# Altium PCB fet-adapter.PcbDoc
Units mil, origin at the board's own origin, x right, y up, seen from the top; angles counter-clockwise.
Board outline 1224 x 925 mil, 2 copper layers (Top Layer, Bottom Layer); 6 components, 18 nets, 45 pads, 1 vias.
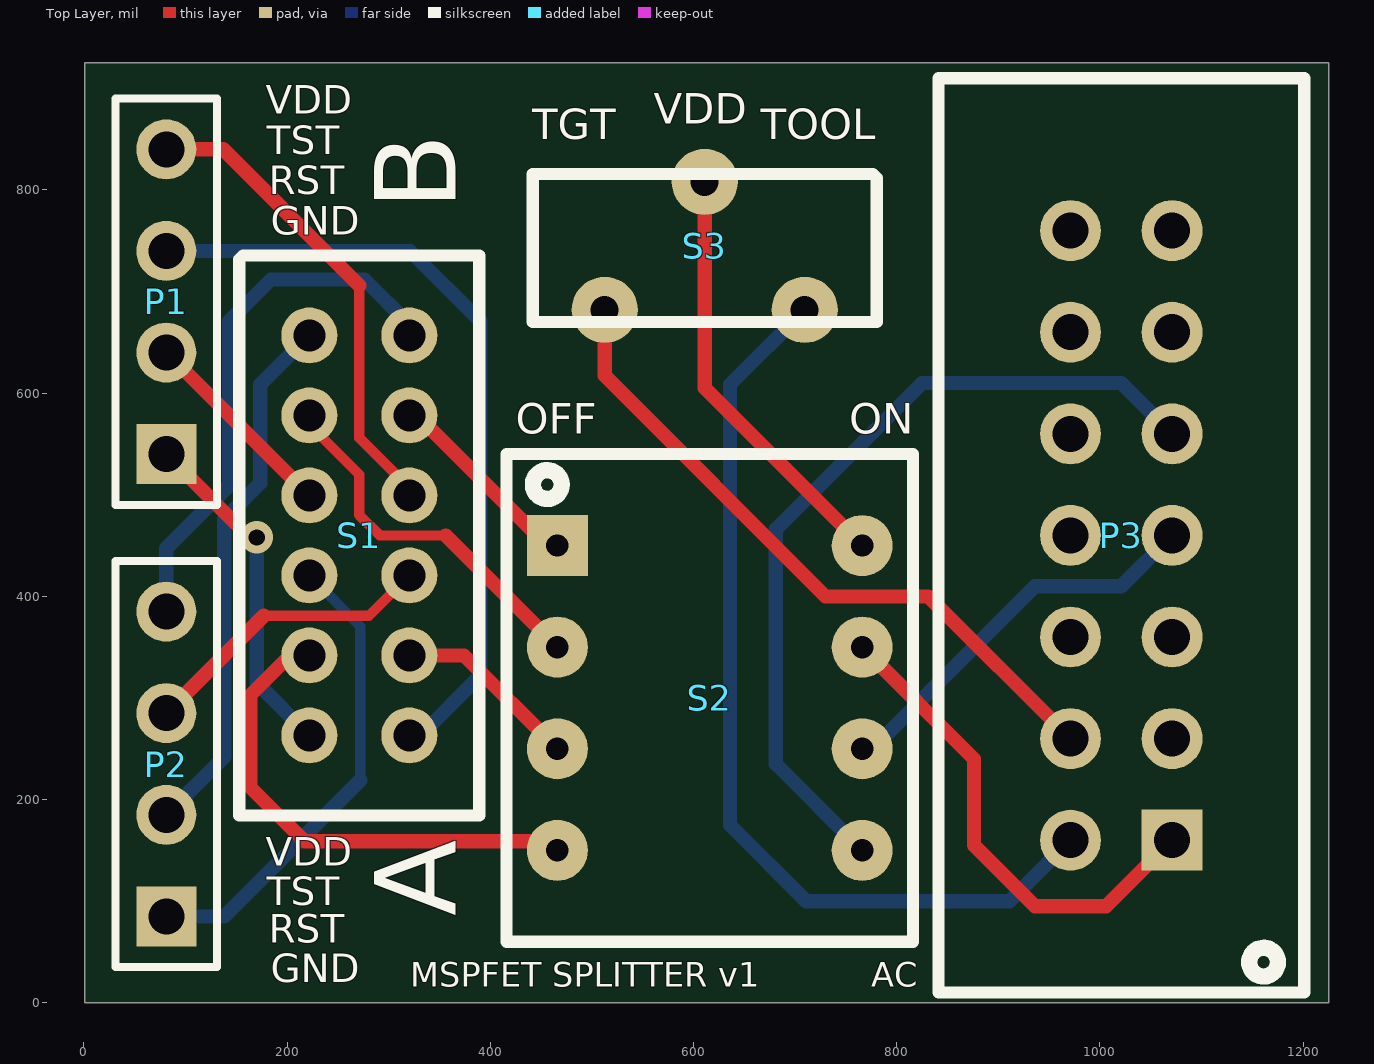
[diagram p0: Top Layer view]
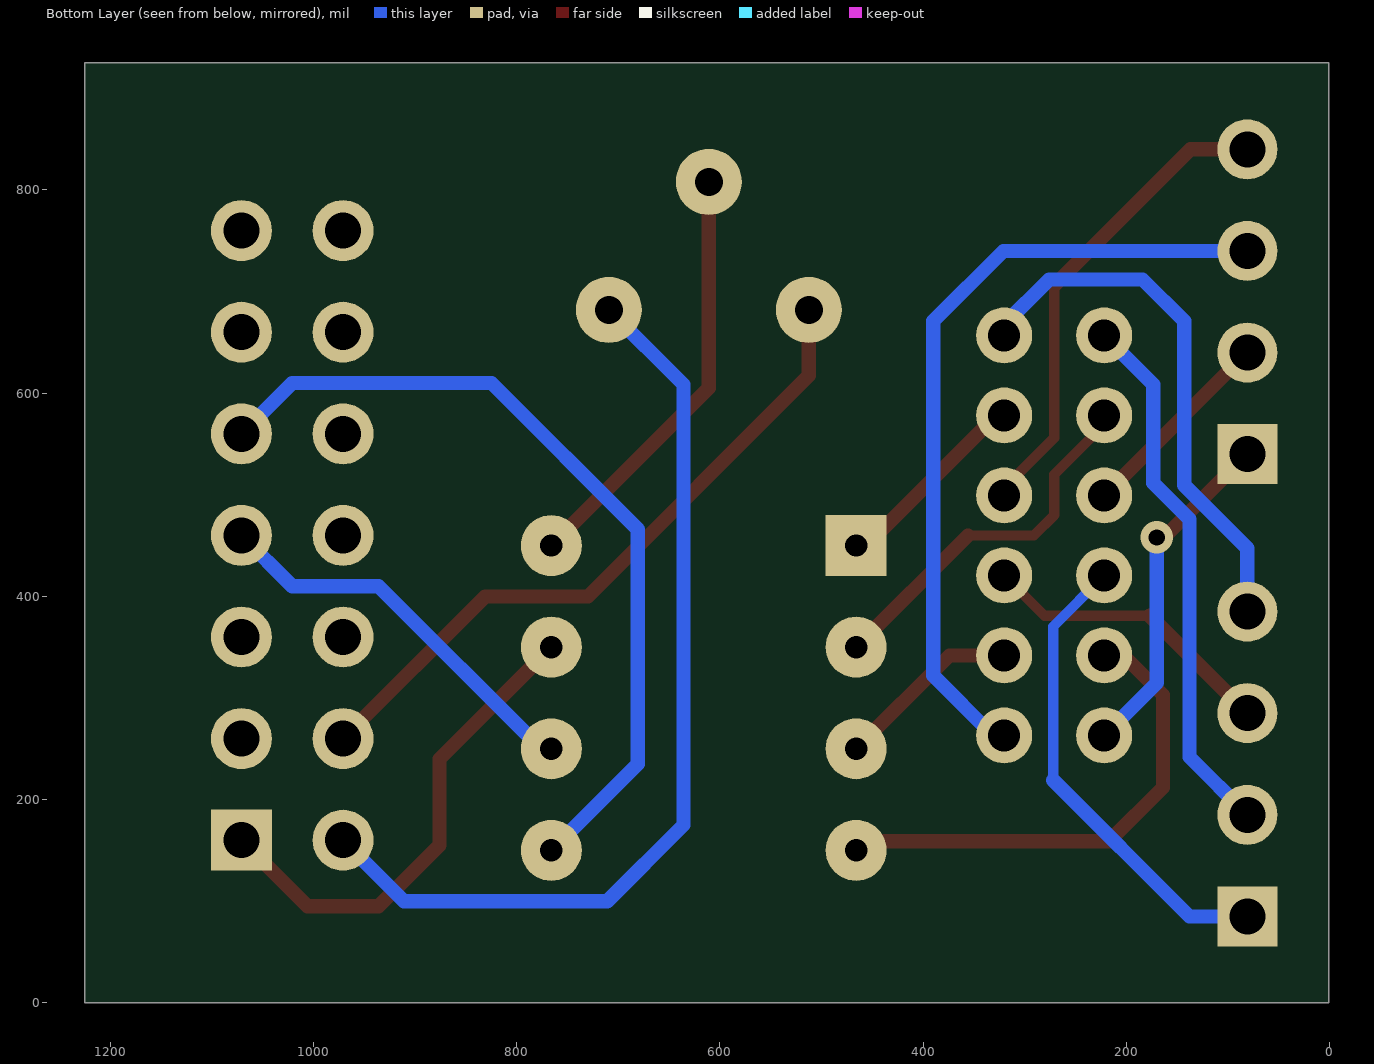
[diagram p1: Bottom Layer view, seen from below]

## Layer stack, top to bottom
Top Solder: solder mask 0.4, Solder Resist, Dk 3.5
Top Layer: signal copper 1.4
Dielectric 1: dielectric 12.6, FR-4, Dk 4.8
Bottom Layer: signal copper 1.4
Bottom Solder: solder mask 0.4, Solder Resist, Dk 3.5

## Board outline
1,0 1225,0 1225,925 1,925

## Design rules (kind name [scope] priority, off if disabled: settings)
Clearance [All] p1: gap=10 ignorepadtopadclearanceinfootprint=FALSE except(0: Arc-Hole Track-Hole SMDPad-Hole THPad-Hole Via-Hole Fill-Hole Poly-Hole Region-Hole Text-Hole; 6: Arc-Arc Arc-Track Arc-SMDPad Arc-THPad Arc-Via Arc-Fill Arc-Poly Arc-Region Track-Track Track-SMDPad Track-THPad Track-Via Track-Fill Track-Poly Track-Region; 8: Arc-Text Track-Text)
ComponentClearance [All] p1: gap=7 collisioncheckmode=3 verticalgap=10 showdistances=FALSE
PolygonConnect [All] p1: connectstyle=Relief reliefconductorwidth=10 reliefentries=4 polygonreliefangle="90 Angle" airgapwidth=10
RoutingVias [All] p1: holewidth=28 width=50 viastyle="Through Hole" minholewidth=28 minwidth=50 maxholewidth=28 maxwidth=50
SolderMaskExpansion [All] p1: expansion=4
Width [All] p1: maxlimit=20 minlimit=10 preferedwidth=12
29 further rules are at their usual default settings.

## Components (designator, comment, footprint, x,y, rotation, side; value= is the part's Value field where it differs from the comment)
P1 "Header 4" HDR1X4 81,540 r90 top
P2 "Header 4" HDR1X4 81,85 r90 top
P3 "Header 7X2" JTAG-14PIN 1021,460 r90 top
S1 "4PDT" MFS401N2Z 271,460 r90 top
S2 "SW-DIP4" DIP4PST 616,300 r270 top
S3 "SW-SPDT" MFS101D15Z 611,745 r0 top

## Footprints (in the part's own frame and the unit in brackets; to place one, negate y for a bottom-side part, rotate by r counter-clockwise, add the part's x,y. Pads: shape width x height; smd on the part's side, far side on the other; paste and mask are expansions set on the pad)
DIP4PST [mil] "DIP Switch 4PST 78H01T"
  rect 60x60 hole 22: 1(-150,-150)
  round 60 hole 22: 2(-50,-150) 3(50,-150) 4(150,-150) 5(150,150) 6(50,150) 7(-50,150) 8(-150,150)
  silkscreen extent -240,-200 240,200, body extent -240,-200 240,200, height 300
HDR1X4 [mm] "Connector; Header; 4 Position"
  rect 1.5x1.5 hole 0.9: 1(0,0)
  round 1.5 hole 0.9: 2(2.54,0) 3(5.08,0) 4(7.62,0)
  silkscreen extent -1.27,-1.27 8.89,1.27
JTAG-14PIN [mil] "JTAG 14 pin header for MSP430"
  rect 60x60 hole 35.43: 1(-300,-50)
  round 60 hole 35.43: 2(-300,50) 3(-200,-50) 4(-200,50) 5(-100,-50) 6(-100,50) 7(0,-50) 8(0,50) 9(100,-50) 10(100,50) 11(200,-50) 12(200,50) 13(300,-50) 14(300,50)
  silkscreen extent -450,-180 450,180, body extent -450,-180 450,180, height 300
MFS101D15Z [mm] "SPDT Switch"
  round 1.651 hole 0.7: 1(-2.5,-1.6) 2(0,1.6) 3(2.5,-1.6)
  silkscreen extent -4.3,-1.9 4.3,1.8, body extent -4.3,-1.8 4.3,1.8, height 5.5
MFS401N2Z [mm] "4PDT Switch Through-Hole"
  round 1.4 hole 0.8: 1(-5,1.25) 2(-3,1.25) 3(-1,1.25) 4(1,1.25) 5(3,1.25) 6(5,1.25) 7(-5,-1.25) 8(-3,-1.25) 9(-1,-1.25) 10(1,-1.25) 11(3,-1.25) 12(5,-1.25)
  silkscreen extent -7,-3 7,3, body extent -7,-3 7,3, height 5.7

## Part data
P1 P2: "Header, 4-Pin", LatestRevisionDate=17-Jul-2002, LatestRevisionNote="Re-released for DXP Platform.", Publisher="Altium Limited"
P3: "Header, 7-Pin, Dual row", DistributorPartNumber=ED10522-ND, Manufacturer="On Shore Technology Inc.", ManufacturerPartNumber=302-S141, Distributor=Digi-Key, LatestRevisionDate=17-Jul-2002
S1: library part SW_4PDT, "4PDT Switch", DistributorPartNumber=563-1568-ND, Manufacturer="Copal Electronics", ManufacturerPartNumber=MFS401N-2-Z, Distributor=Digi-Key
S2: "DIP Switch", DistributorPartNumber=GH7198-ND, Manufacturer="Grayhill Inc.", ManufacturerPartNumber=78H01T, Distributor=Digi-Key, LatestRevisionDate=17-Jul-2002, PackageReference=DIP-8, Published=24-Mar-1999
S3: "SPDT Subminiature Toggle Switch, Right Angle Mounting, Vertical Actuation", DistributorPartNumber=563-1554-ND, Manufacturer="Copal Electronics", ManufacturerPartNumber=MFS101D-15-Z, ComponentLink1Description="Manufacturer Link", ComponentLink1URL=http://www.apem.com, DatasheetVersion=05-Dec-2000, Distributor=Digi-Key, LatestRevisionDate=17-Dec-2003, PackageDescription="Switch; 4 Leads", PackageReference=TL36WW15050, Published=24-Mar-1999

## Via types
v1: diameter 32, hole 16, Top Layer to Bottom Layer, tented both sides, 1 vias

## Nets (pads, with @x,y where several pads share a name; then routed paths per layer and width w, separated by ;. In a path a pad name is that pad's centre, name@x,y a point inside that pad or via, vN(x,y) a via of type N, cw(c..) or ccw(c..) an arc to the next point about the centre after c; other vN are vias at no path point)
GND: P3.9 S2.5 | length 821.6
  Bottom Layer w14: S2.5 681,235 681,466 825,610 1021,610 P3.9
GND_A: P1.1 S1.1 | length 339.3
  Top Layer w14: P1.1 163,458 v1(170,458)
  Bottom Layer w14: v1(170,458) 170,314.94 S1.1
GND_B: P2.1 S1.3 | length 468.9
  Bottom Layer w10: S1.3 272,370.42 272,219
  Bottom Layer w14: P2.1 138,85 272,219
SBWTCK: P3.7 S2.6 | length 392
  Bottom Layer w12: S2.6 S2.6@776,250
  Bottom Layer w14: S2.6@776,250 936,410 1021,410 P3.7
SBWTDIO_RST: P3.1 S2.7 | length 487.3
  Top Layer w14: S2.7 876,240 876,155 936,95 1006,95 P3.1
SW_GND: S1.2 S2.4 | length 492.6
  Top Layer w12: S1.2@202.89,341.89 S1.2 ; S2.4@457,159 S2.4
  Top Layer w14: S1.2@202.89,341.89 164,303 164,212 217,159 S2.4@457,159
SW_TCK_TST: S1.8 S2.3 | length 183.8
  Top Layer w14: S1.8 374.11,341.89 S2.3
SW_TDIO_RST: S1.5 S2.2 | length 367.3
  Top Layer w10: S1.5 221.79,569.21 271,520 271,480 291,460 356,460
  Top Layer w14: 356,460 S2.2
SW_VDD: S1.11 S2.1 | length 190.3
  Top Layer w10: S2.1@456,450 S2.1
  Top Layer w14: S1.11@328.5,577.5 S2.1@456,450
TCK_TST_A: P1.3 S1.7 | length 780.7
  Bottom Layer w14: P1.3 321,740 390,671 390,322 331.15,263.15 S1.7
TCK_TST_B: P2.3 S1.9 | length 295.4
  Top Layer w10: 177,381 280.58,381 S1.9
  Top Layer w14: P2.3 177,381
TDIO_RST_A: P1.2 S1.4 | length 199
  Top Layer w14: P1.2 81.16,640 S1.4
TDIO_RST_B: P2.2 S1.6 | length 530.2
  Bottom Layer w14: P2.2 138,242 138,476 173.47,511.47 173.47,608.53 S1.6
VDD: S2.8 S3.2 | length 422.2
  Top Layer w14: S3.2 611,605 S2.8
VDD_A: P1.4 S1.10 | length 472.5
  Top Layer w10: 271,706 271,556 320.21,506.79 S1.10
  Top Layer w14: P1.4 137,840 271,706
VDD_B: P2.4 S1.12 | length 535.1
  Bottom Layer w14: P2.4 81,447.28 143,509.28 143,671 184,712 276,712 320.21,667.79 S1.12
VDD_TARGET: P3.4 S3.1 | length 671.1
  Top Layer w14: S3.1 512.57,617.43 730,400 831,400 P3.4
VDD_TOOL: P3.2 S3.3 | length 928.3
  Bottom Layer w14: S3.3 636,608.58 636,175 711,100 911,100 P3.2
pads on no net: P3.3 P3.5 P3.6 P3.8 P3.10 P3.11 P3.12 P3.13 P3.14

## Silkscreen, mask and mechanical layers (free items; w line width, h text height)
Top Overlay:
  text "VDD" at 179,875 h28
  text "VDD" at 561,865 h30
  text "TGT" at 441,850 h30
  text "TOOL" at 666,850 h30
  text "TST" at 180,835 h28
  text "RST" at 182,796 h28
  text "B" at 366,780 h80 r90
  text "GND" at 184,756 h28
  text "OFF" at 425,560 h30
  text "ON" at 753,560 h30
  text "VDD" at 179,135 h28
  text "TST" at 180,96 h28
  text "A" at 366,85 h80 r90
  text "RST" at 182,59 h28
  text "GND" at 184,20 h28
  text "MSPFET SPLITTER v1" at 321,16 h24
  text "AC" at 775,16 h24
Mechanical 13:
  lines w12: 0,0 0,925 1225,925 1225,0 0,0